# Altium PCB dual-ecal-RF-board.PcbDoc
Units mil, origin at the board's own origin, x right, y up, seen from the top; angles counter-clockwise.
Board outline 1300 x 1100 mil, 2 copper layers (Top Layer, Bottom Layer); 21 components, 23 nets, 164 pads, 0 vias.
Unrouted connection lines stored in the file: 133.
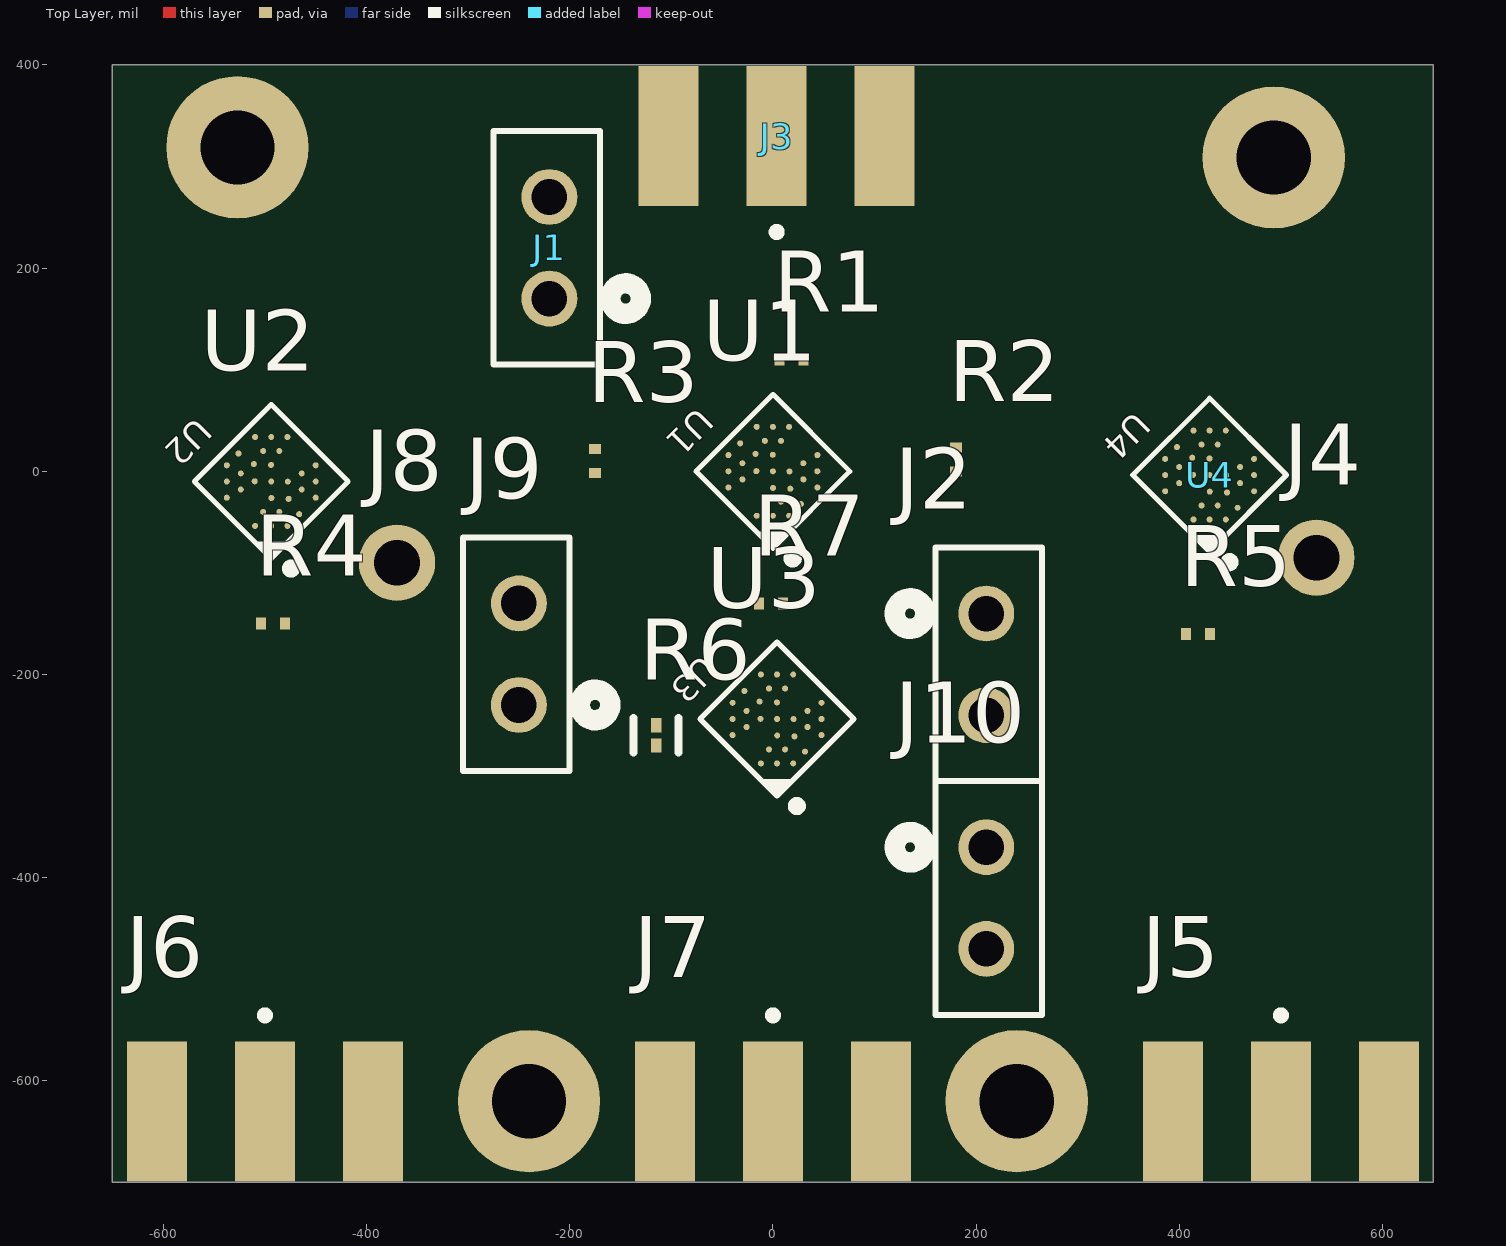
[diagram p0: Top Layer view]
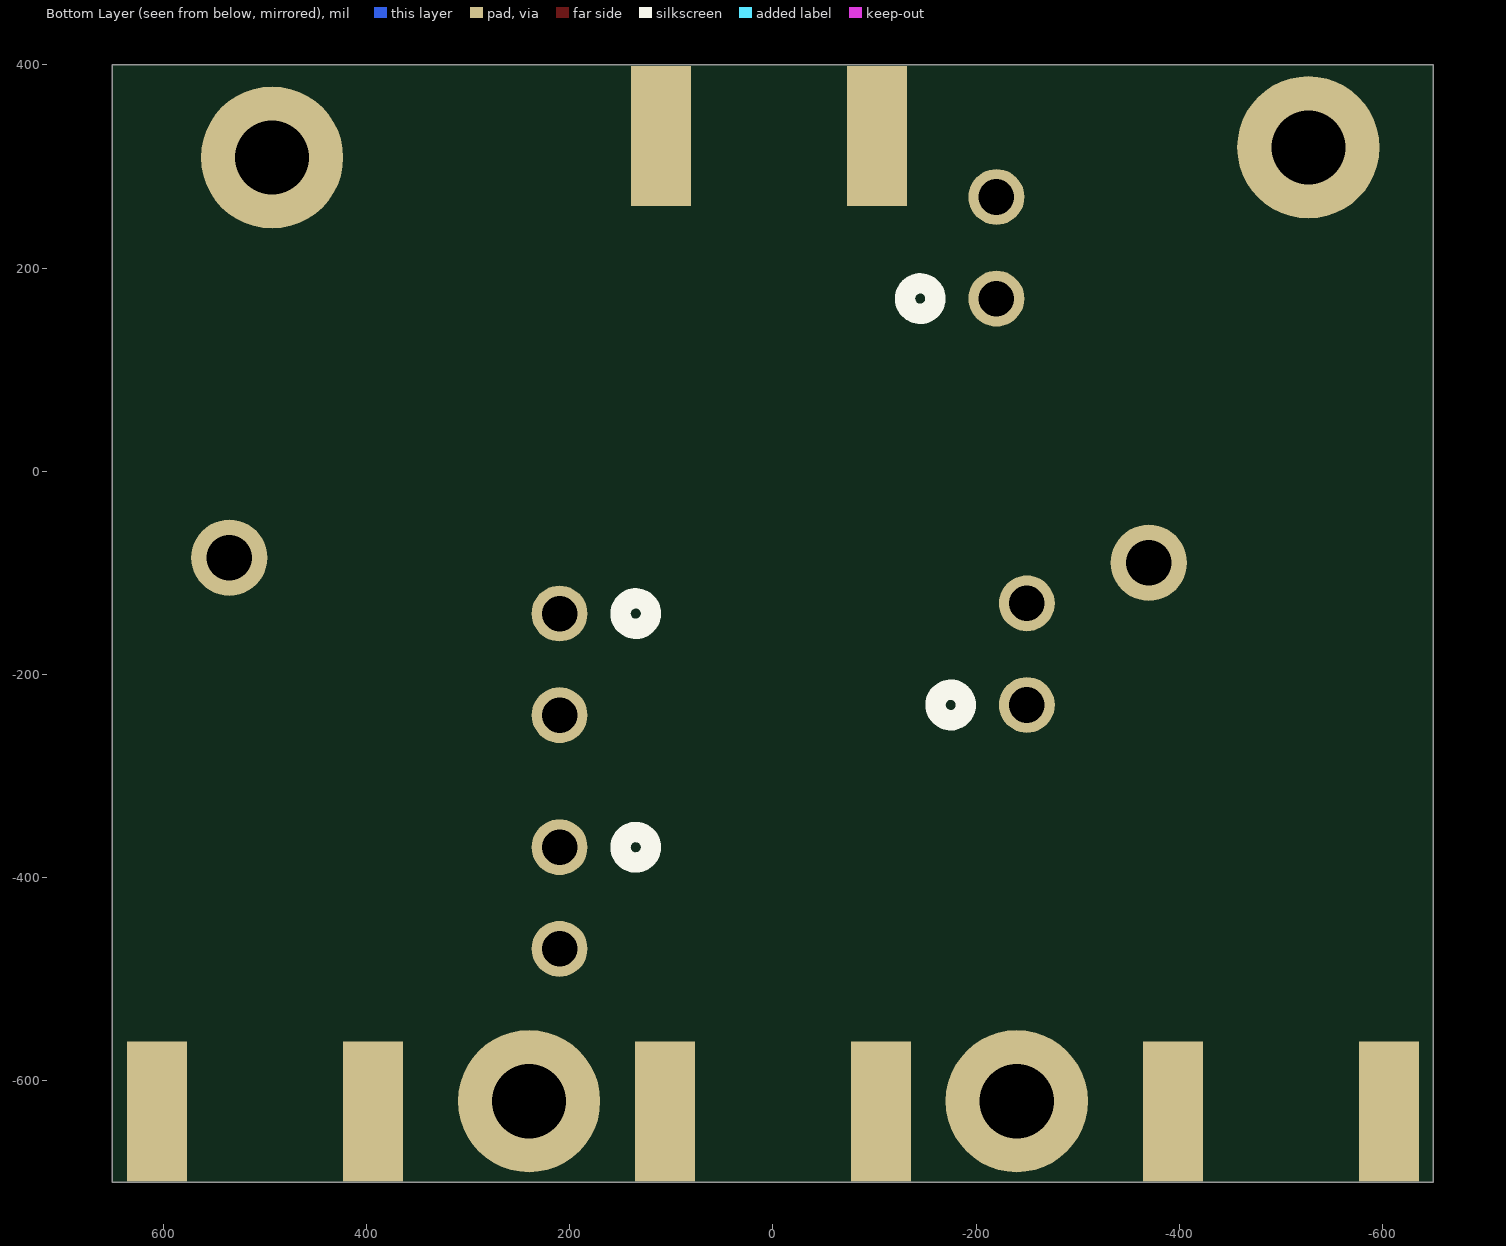
[diagram p1: Bottom Layer view, seen from below]

## Layer stack, top to bottom
Top Solder: solder mask 0.4, Solder Resist, Dk 3.5
Top Layer: signal copper 1.4
Dielectric 1: dielectric 12.6, FR-4, Dk 4.8
Bottom Layer: signal copper 1.4
Bottom Solder: solder mask 0.4, Solder Resist, Dk 3.5

## Board outline
-650,-700 -650,400 650,400 650,-700

## Design rules (kind name [scope] priority, off if disabled: settings)
Clearance [All] p1: gap=10 ignorepadtopadclearanceinfootprint=FALSE
PolygonConnect [All] p1: connectstyle=Relief reliefconductorwidth=10 reliefentries=4 polygonreliefangle="90 Angle" airgapwidth=10
RoutingVias [All] p1: holewidth=28 width=50 viastyle="Through Hole" minholewidth=28 minwidth=50 maxholewidth=28 maxwidth=50
SolderMaskExpansion [All] p1: expansion=4 istentingtop=FALSE
Width [All] p1: maxlimit=10 minlimit=10 preferedwidth=10
30 further rules are at their usual default settings.

## Classes and differential pairs
component class dual-ecal-RF-board: J1 J3 J4 J5 J6 J7 J8 J9 R1 R2 R3 R4 R5 R6 R7 U1 U2 U3 U4

## Components (designator, comment, footprint, x,y, rotation, side; value= is the part's Value field where it differs from the comment)
J1 "TSW-102-07-G-S" TSW-102-07-G-S-iceberg -220,220 r90 top
J2 "TSW-102-07-G-S" TSW-102-07-G-S-iceberg 210,-190 r270 top
J3 "CON-SMA-EDGE-S" RFSOLUTIONS_CON-SMA-EDGE-S 3.7,330 r270 top
J4 "Single Pin" "Single PC Pin" 535,-85 r0 top
J5 "CON-SMA-EDGE-S" RFSOLUTIONS_CON-SMA-EDGE-S 500,-630 r90 top
J6 "CON-SMA-EDGE-S" RFSOLUTIONS_CON-SMA-EDGE-S -500,-630 r90 top
J7 "CON-SMA-EDGE-S" RFSOLUTIONS_CON-SMA-EDGE-S 0,-630 r90 top
J8 "Single Pin" "Single PC Pin" -370,-90 r0 top
J9 "TSW-102-07-G-S" TSW-102-07-G-S-iceberg -250,-180 r90 top
J10 "TSW-102-07-G-S" TSW-102-07-G-S-iceberg 210,-420 r270 top
R1 "TE connectivity CPF0201B56K2E1" 0201-resistor 18.19,110 r180 top value=56k
R2 "TE connectivity CPF0201B56K2E1" 0201-resistor 180,11.81 r270 top value=56k
R3 "TE connectivity CPF0201B56K2E1" 0201-resistor -175,10 r270 top value=56k
R4 "TE connectivity CPF0201B56K2E1" 0201-resistor -491.81,-150 r0 top value=56k
R5 "TE connectivity CPF0201B56K2E1" 0201-resistor 418.19,-160 r0 top value=56k
R6 "TNPW020150R0BEED" FP-ERJ1GN-IPC_C -115,-260.01 r90 top
R7 "TE connectivity CPF0201B56K2E1" 0201-resistor -1.81,-130 r180 top value=56k
U1 "MM5130*" MM5130-NORM_PCB_NOFLOOD 0,0 r135 top
U2 "MM5130*" MM5130-NORM_PCB_NOFLOOD -493.76,-10 r135 top
U3 "MM5130*" MM5130-NORM_PCB_NOFLOOD 4.08,-243.76 r135 top
U4 "MM5130*" MM5130-NORM_PCB_NOFLOOD 429.86,-3.71 r135 top

## Footprints (in the part's own frame and the unit in brackets; to place one, negate y for a bottom-side part, rotate by r counter-clockwise, add the part's x,y. Pads: shape width x height; smd on the part's side, far side on the other; paste and mask are expansions set on the pad)
0201-resistor [mm]
  rect 0.25x0.3 smd: 1(-0.3,0) 2(0.3,0)
FP-ERJ1GN-IPC_C [mil]
  rect 13.94x10.34 smd paste+0 mask+0: 1(-10.01,0) 2(10.01,0)
  silkscreen extent -17,-22 17,22, body extent -21,-10 21,10, height 10
MM5130-NORM_PCB_NOFLOOD [mm]
  round 0.15 smd mask+0.025: 1(-1.072,0.5) 2(-1.072,0.084) 3(-1.072,-0.5) 4(-0.786,-0.786) 5(-0.5,-1.072) 6(0.5,-1.072) 7(0.786,-0.786) 8(1.072,-0.5) 9(1.072,0.084) 10(1.072,0.5) 11(0.786,0.786) 12(0.5,1.072) 13(-0.5,1.072) 14(-0.786,0.786) 15(-0.681,0.396) 16(-0.615,0) 17(-0.681,-0.396) 18(-0.396,-0.681) 19(0.396,-0.681) 20(0.681,-0.396) 21(0.615,0) 22(0.681,0.396) 23(0.396,0.681) 24(-0.396,0.681) 25(-0.295,0.29) 26(-0.295,-0.29) 27(0.295,-0.29) 28(0.295,0.29) 29(0,0)
  silkscreen extent -1.99,-1.36 1.36,1.36, body extent -1.27,-1.27 1.27,1.27, height 0.98
RFSOLUTIONS_CON-SMA-EDGE-S [mm]
  rect 3.5x1.5 smd: 1(0,0) G1(0,2.7) G2(0,-2.7)
  rect 3.5x1.5 smd far side: G3(0,2.7) G4(0,-2.7)
  silkscreen extent 2.3,-0.1 2.5,0.1, body extent -11.27,-3.18 2.06,3.18, height 3.55
"Single PC Pin" [mil]
  round 75 hole 45: 1(0,0)
TSW-102-07-G-S-iceberg [mil]
  round 55 / inner round 60 / far side round 55 hole 35 paste-99999 mask+0: 1(-50,0) 2(50,0)
  silkscreen extent -115,-90 115,55, body extent -105,-50 100,50, height 55

## Part data
J1: library part TSW-102-07-G-S-iceberg, "No Description Available", Mfr_Name="Samtec Inc", Copyright="Copyright (C) 2024 Ultra Librarian. All rights reserved.", Manufacturer_Part_Number=TSW-102-07-G-S, RefDes=RefDes, Type=DEV
J2 J9 J10: library part TSW-102-07-G-S-topside, "No Description Available", Mfr_Name="Samtec Inc", Copyright="Copyright (C) 2024 Ultra Librarian. All rights reserved.", Manufacturer_Part_Number=TSW-102-07-G-S, RefDes=RefDes, Type=DEV
J3 J5 J6 J7: "SMA Connector Jack, Female Socket - Board Edge, End Launch Solder", Package=None, Check_prices=https://www.snapeda.com/parts/CON-SMA-EDGE-S/RF+Solutions/view-part/?ref=eda, Digi-Key_Part_Number=CON-SMA-EDGE-S-ND, MF="RF Solutions", MP=CON-SMA-EDGE-S, Purchase-URL=https://pricing.snapeda.com/search/part/CON-SMA-EDGE-S/?ref=eda, SnapEDA_Link=https://www.snapeda.com/parts/CON-SMA-EDGE-S/RF+Solutions/view-part/?ref=snap
J4 J8: library part "Single PC Pin", Supplier Part Number 1=575-2617001340000, Supplier 1=Mouser
R1 R2 R3 R4 R5 R7: "CPF 0201 56K2 0.1% 25PPM 1K RL", Mfgr Part No.=CPF0201B56K2E1, Package=None, Availability=Unavailable, Mfgr="TE connectivity", MP=ERJ1GN0R00C, Price=None
R6: library part CMP-1010-00416-3, "RES SMD 50 OHM 0.1% 1/20W 0201", Case Code (Imperial)=0201, Case Code (Metric)=0603, Max Operating Temperature=125°C, Max Power Dissipation=50mW, Min Operating Temperature=-55°C, Package Quantity=15000, Resistance=1kR, Resistance Tolerance=1%, Resistor Type="Thick Film", Temperature Coefficient=200ppm/°C, Voltage Rating=25V, Case/Package=0201, Contact Plating=Tin, Features="Automotive AEC-Q200", Height=0.01inch, Lead Free="Lead Free", Length=0.6mm, Mount="Surface Mount", Number of Pins=2, Number of Terminations=2, Packaging="Tape and Reel", Power Rating=50mW, Radiation Hardening=No, RoHS Compliant=Yes, Series=ERJ, Size Code=0201, Termination=SMD/SMT, Tolerance=1%, Voltage Rating (DC)=25V, Weight=6E-06oz, Width=0.012inch
U1 U2 U3 U4: library part IC-MM5130, "High power SP4T MEMs switch"

## Free pads (board coordinates)
  round 140 hole 73: 8(-527.04,318.84) 8(-240,-620) 8(240,-620) 8(492.96,308.84)

## Nets (pads, with @x,y where several pads share a name; then routed paths per layer and width w, separated by ;. In a path a pad name is that pad's centre, name@x,y a point inside that pad or via, vN(x,y) a via of type N, cw(c..) or ccw(c..) an arc to the next point about the centre after c; other vN are vias at no path point)
GND: R1.1 R2.1 R3.1 R4.1 R5.1 R6.1 R7.1 U1.1 U1.3 U1.5 U1.6 U1.8 U1.10 U1.12 U1.13 U1.15 U1.17 U1.18 U1.19 U1.20 U1.22 U1.23 U1.24 U1.25 U1.26 U1.27 U1.28 U2.1 U2.3 U2.5 U2.6 U2.7 U2.8 U2.9 U2.10 U2.11 U2.12 U2.13 U2.15 U2.17 U2.18 U2.19 U2.20 U2.21 U2.22 U2.23 U2.24 U2.25 U2.26 U2.27 U2.28 U3.1 U3.3 U3.5 U3.6 U3.8 U3.10 U3.11 U3.12 U3.13 U3.15 U3.17 U3.18 U3.19 U3.20 U3.22 U3.23 U3.24 U3.25 U3.26 U3.27 U3.28 U4.1 U4.3 U4.4 U4.5 U4.6 U4.7 U4.8 U4.10 U4.12 U4.13 U4.15 U4.16 U4.17 U4.18 U4.19 U4.20 U4.21 U4.22 U4.23 U4.24 U4.25 U4.26 U4.27 U4.28
NetJ1_1: J1.1 U1.9
NetJ1_2: J1.2 U1.21
NetJ2_1: J2.1 U1.16
NetJ2_2: J2.2 U1.2
NetJ3_1: J3.1 R1.2 U1.7
NetJ3_G1: J3.G1 J3.G2 J3.G3 J3.G4
NetJ4_1: J4.1 U4.2 U4.9
NetJ5_1: J5.1 R5.2 U4.14
NetJ5_G1: J5.G1 J5.G2 J5.G3 J5.G4
NetJ6_1: J6.1 R4.2 U2.14
NetJ6_G1: J6.G1 J6.G2 J6.G3 J6.G4
NetJ7_1: J7.1 R7.2 U3.14
NetJ7_G1: J7.G1 J7.G2 J7.G3 J7.G4
NetJ8_1: J8.1 U2.2 U2.16
NetJ9_1: J9.1 U3.16
NetJ9_2: J9.2 U3.2
NetJ10_1: J10.1 U3.9
NetJ10_2: J10.2 U3.21
NetR2_2: R2.2 U1.4 U4.11
NetR3_2: R3.2 U1.11 U2.4
NetR6_2: R6.2 U3.4
NetU1_14: U1.14 U3.7
pads on no net: U1.29 U2.29 U3.29 U4.29

## Silkscreen, mask and mechanical layers (free items; w line width, h text height)
Mechanical 1:
  the board outline again, w10